# Altium PCB Project_Kondrashova_motor_driver.PcbDoc
Units mm, origin at the board's own origin, x right, y up, seen from the top; angles counter-clockwise.
Board outline 42 x 30 mm, 4 copper layers (Top Layer, Signal Layer 1, Signal Layer 2, Bottom Layer), stack 1.522 mm thick; 38 components, 37 nets, 117 pads, 157 vias.
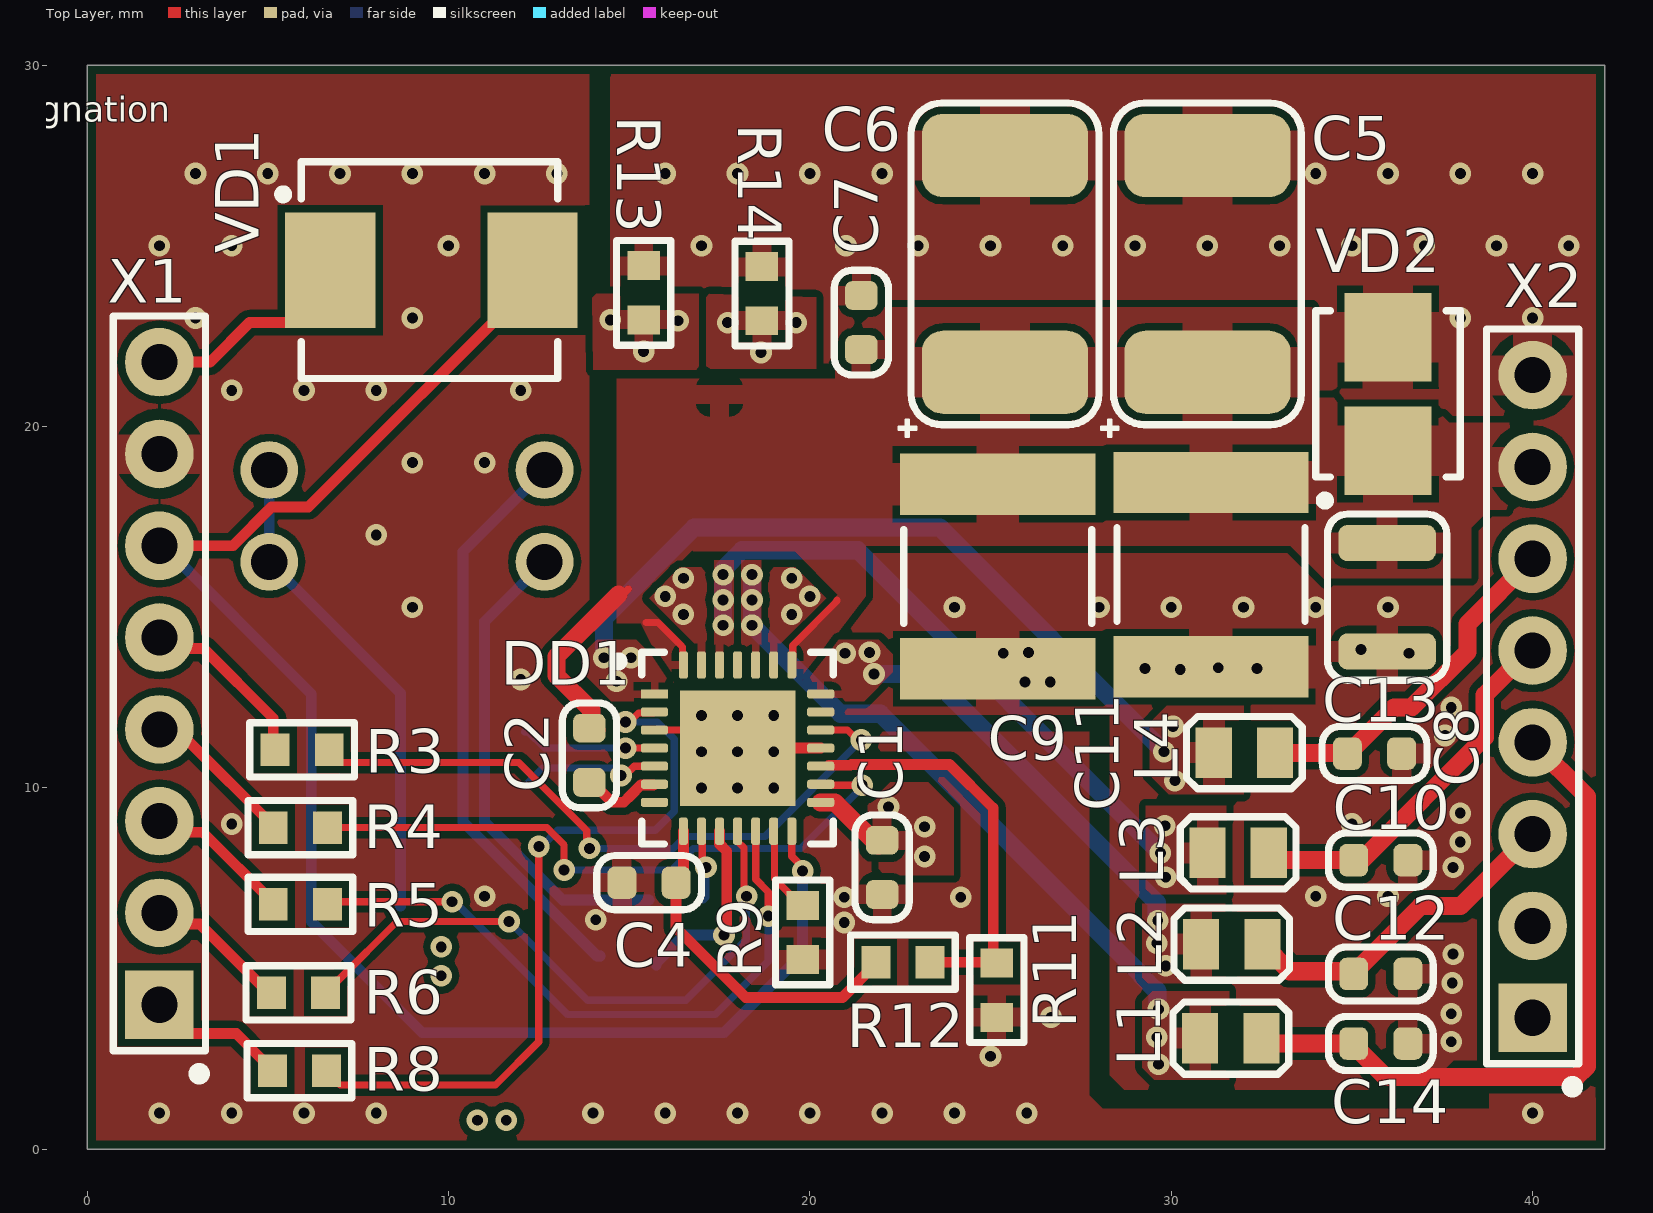
[diagram p0: Top Layer view]
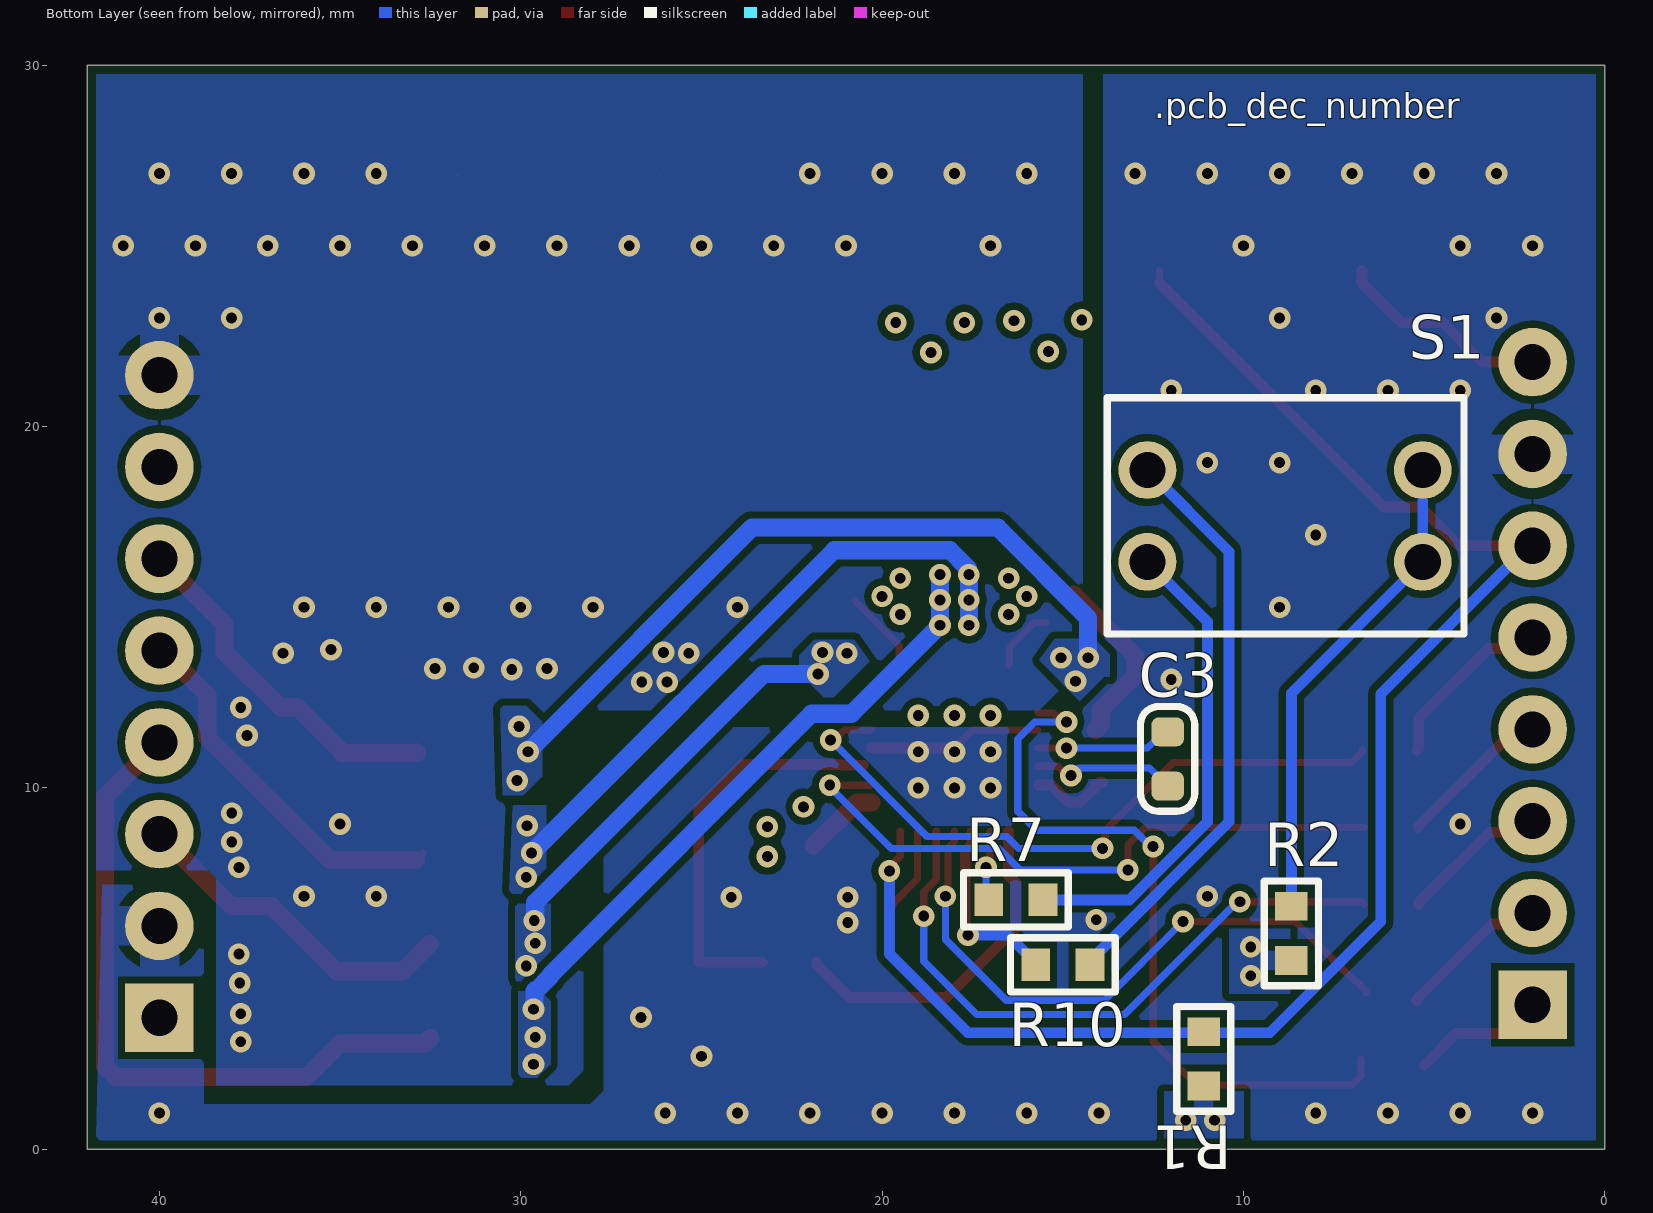
[diagram p1: Bottom Layer view, seen from below]
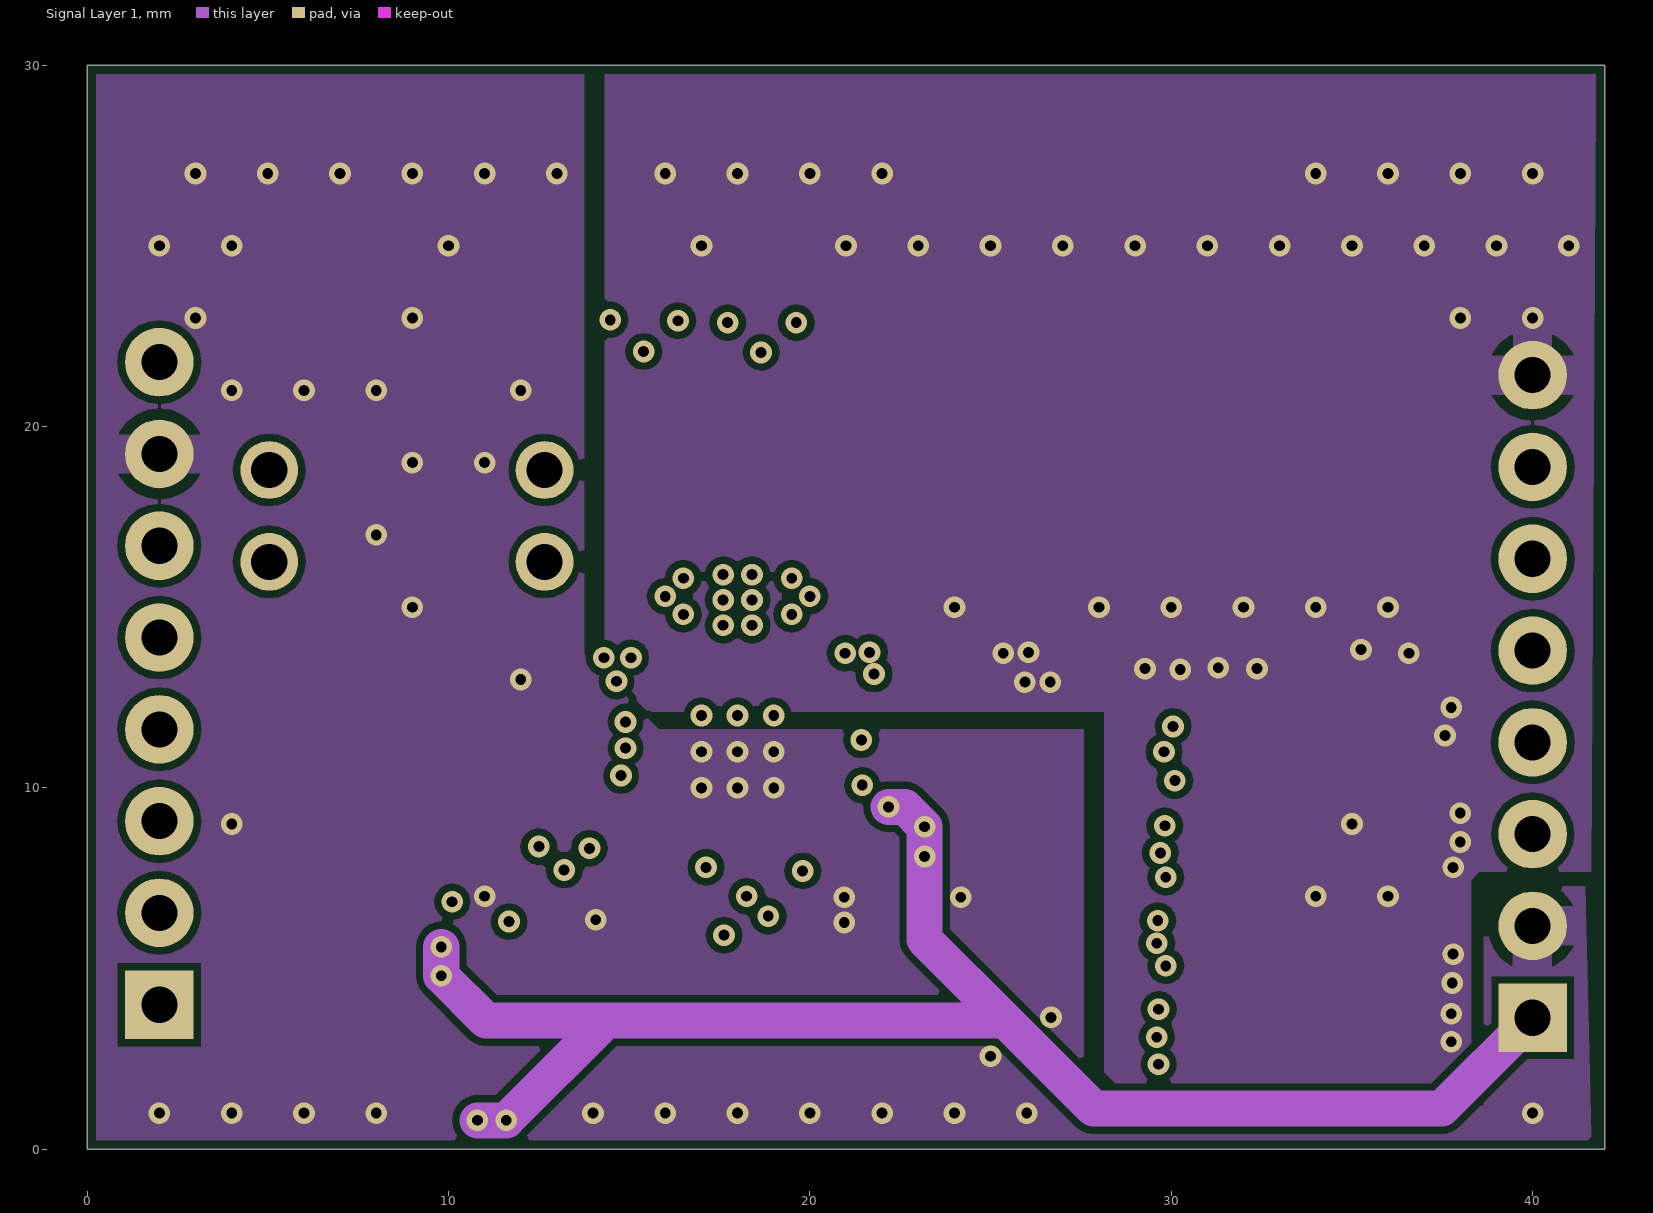
[diagram p2: Signal Layer 1]
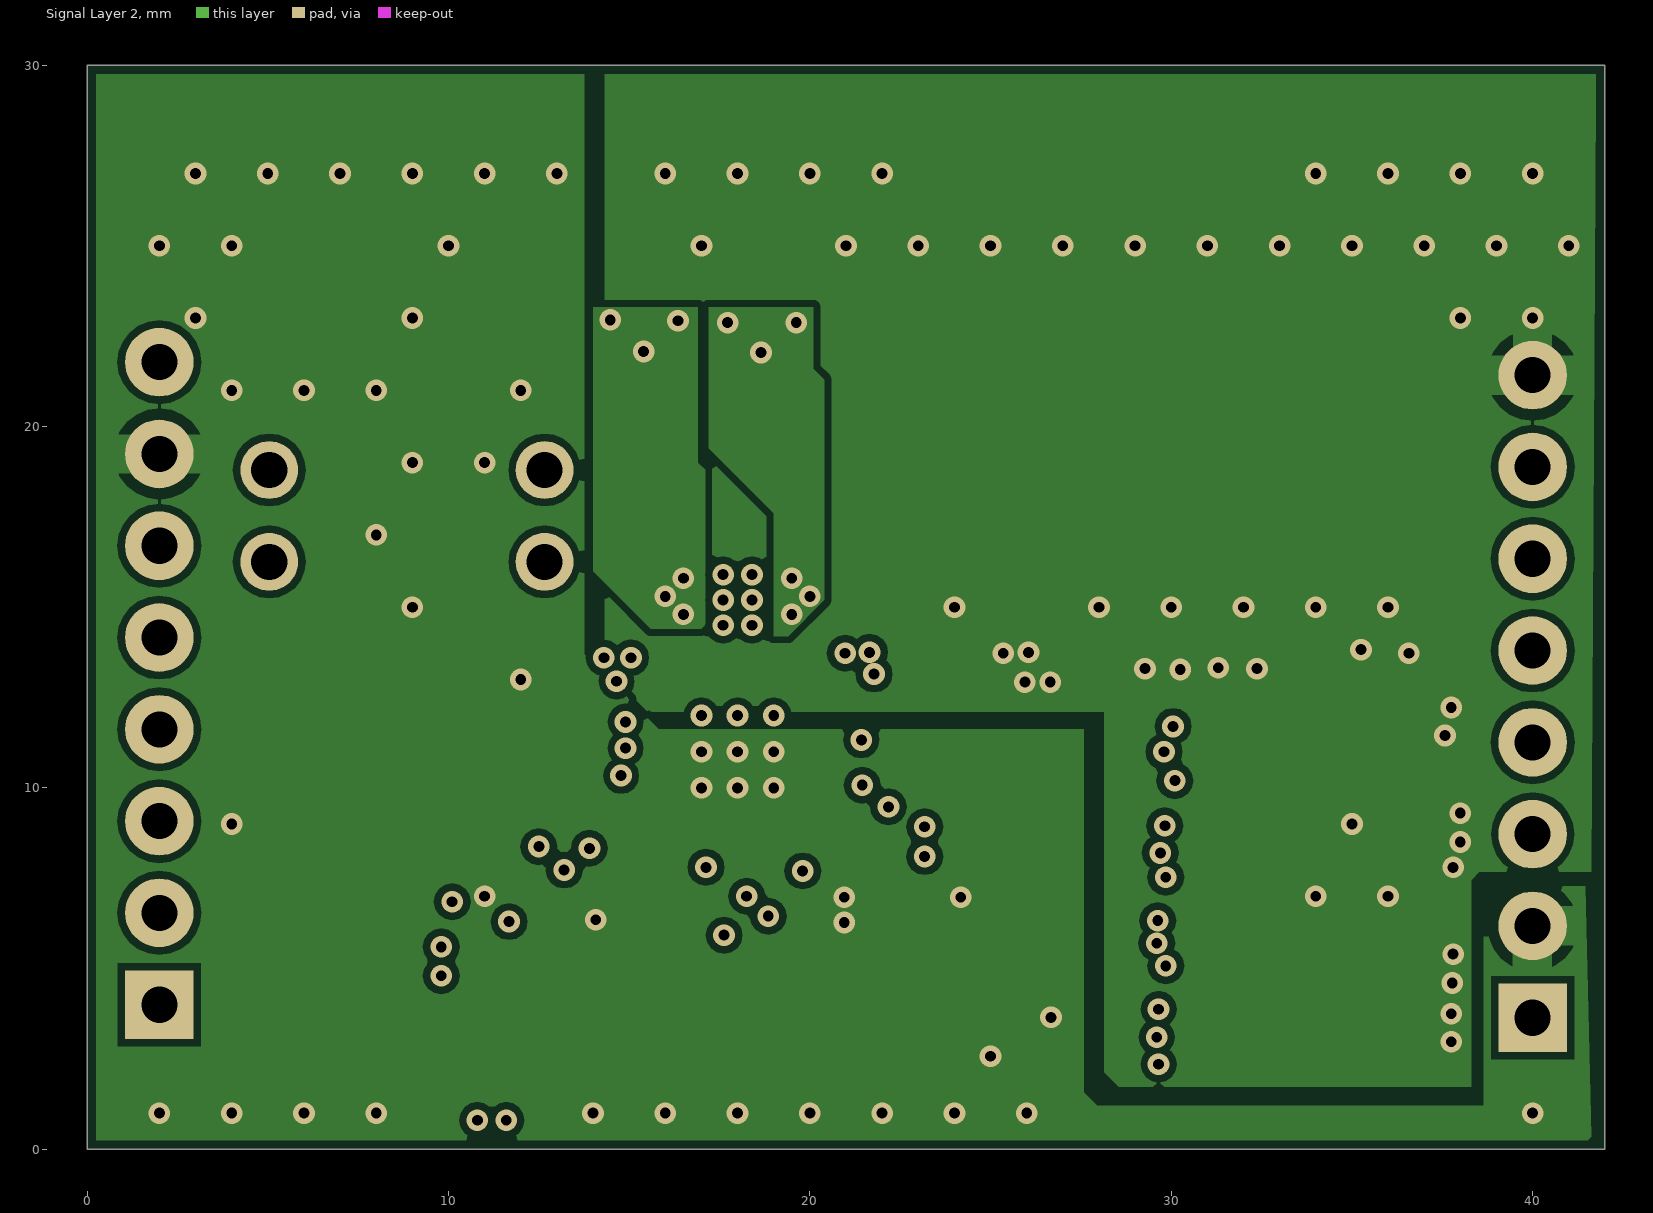
[diagram p3: Signal Layer 2]
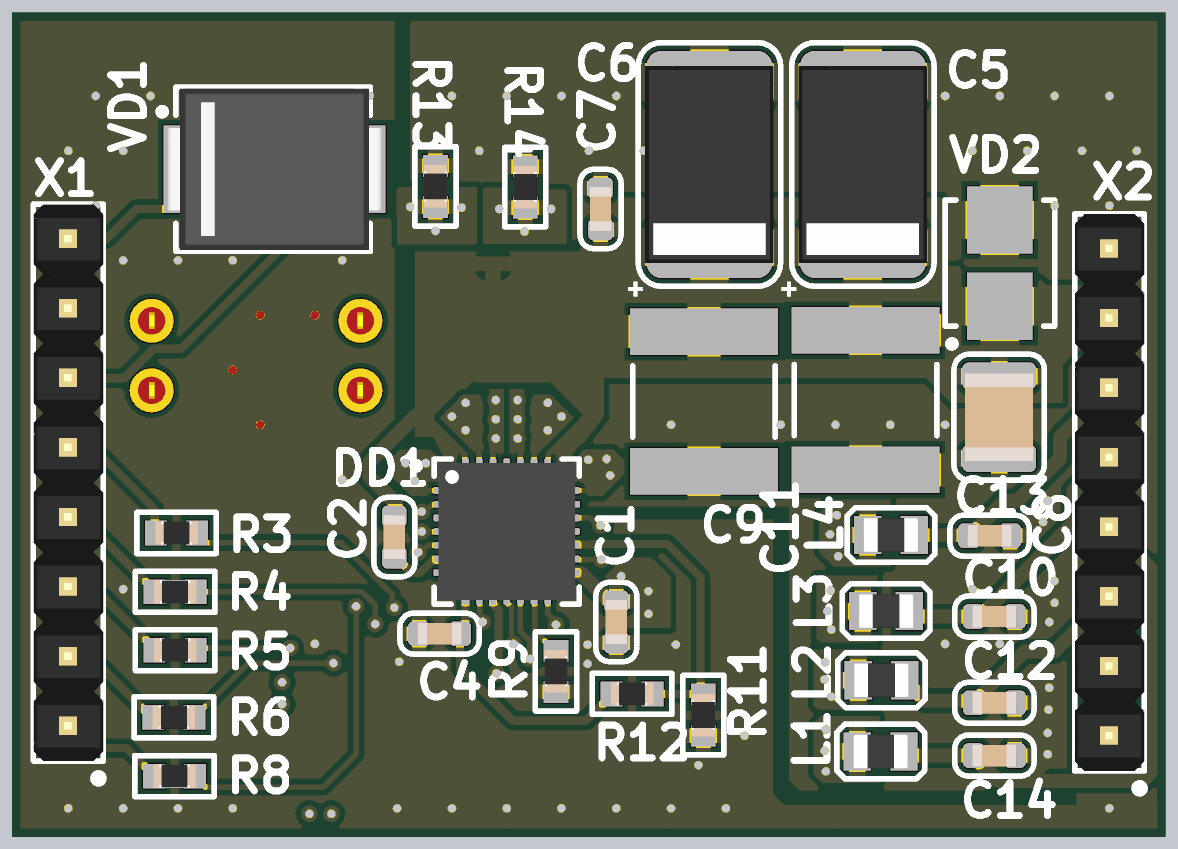
[diagram p4: 3D render of the assembled board from above, using the file's embedded part models]
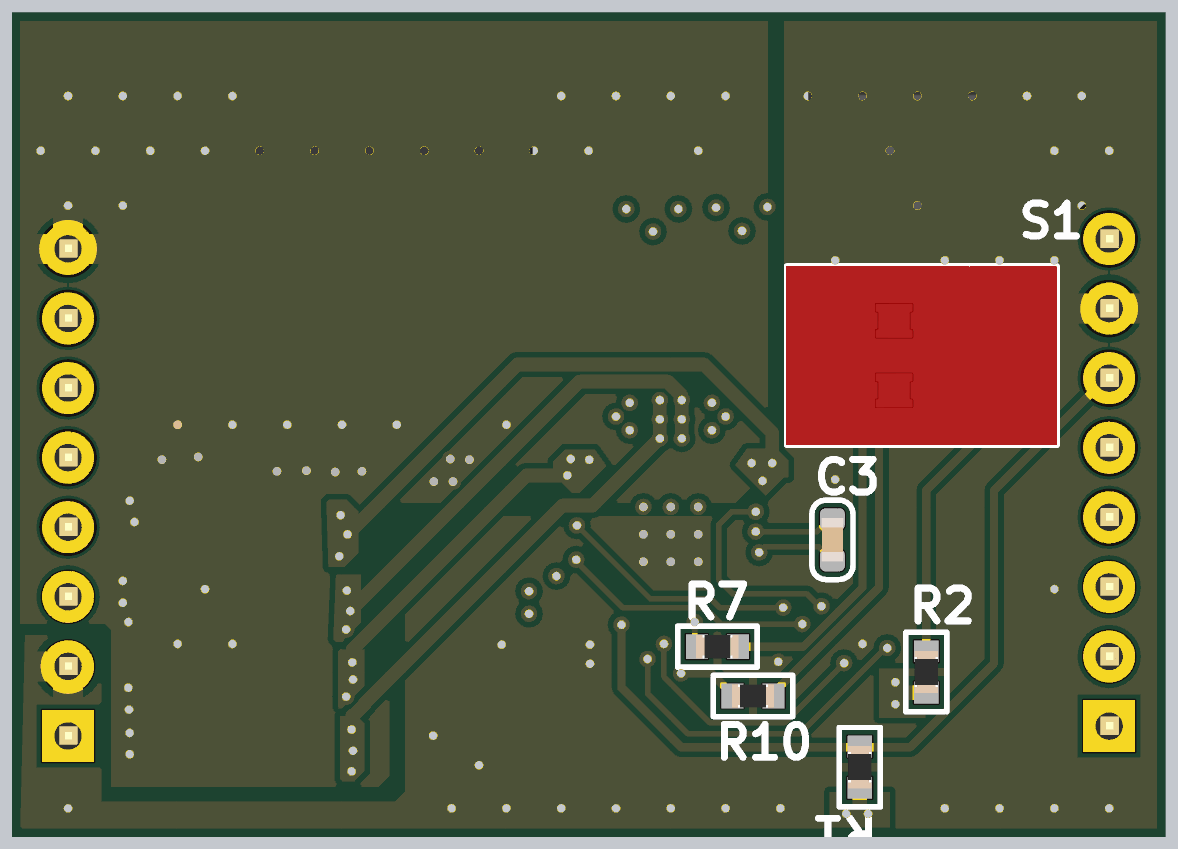
[diagram p5: 3D render of the assembled board from below, using the file's embedded part models]

## Layer stack, top to bottom
Top Solder: solder mask 0.0102, Solder Resist, Dk 3.5
Top Layer: signal copper 0.018
Prepreg 1: prepreg 0.125, FR4 HiTg170, Dk 5.07
Signal Layer 1: signal copper 0.018
Core 1: core 1.2, FR4, Dk 4.6
Signal Layer 2: signal copper 0.018
Prepreg 2: prepreg 0.125, FR4 HiTg170, Dk 5.07
Bottom Layer: signal copper 0.018
Bottom Solder: solder mask 0.0102, Solder Resist, Dk 3.5

## Board outline
0,0 0,30 42,30 42,0

## Design rules (kind name [scope] priority, off if disabled: settings)
AcuteAngle min_acute_angle [OnCopper] p1: minimum=3.50000000000000E+0001 checktracksonly=FALSE // Минимальный угол между примитивами топологии
BoardOutlineClearance board_outline_clearance_std [NOT (OnLayer('Bottom Overlay') OR OnLayer('Top Overlay'))] p1: gap=0.25 ignorepadtopadclearanceinfootprint=FALSE except(0: Arc-SplitContinuation Track-SplitContinuation SMDPad-SplitContinuation THPad-SplitContinuation Via-SplitContinuation Fill-SplitContinuation Poly-SplitContinuation Region-SplitContinuation Text-SplitContinuation) // Отступ элементов топологии от края фрезеруемой печатной платы
Clearance clearance_outer_18um_std [OnTopLayer OR OnBottomLayer] p1: gap=0.125 ignorepadtopadclearanceinfootprint=TRUE except(0.2: Arc-Fill Arc-Poly Track-Fill Track-Poly SMDPad-SMDPad SMDPad-Fill SMDPad-Poly THPad-Fill THPad-Poly Via-Fill Via-Poly Fill-Fill Fill-Poly Poly-Poly Poly-Region Poly-Text; 0.25: Arc-Hole Track-Hole SMDPad-Hole THPad-Hole Via-Hole Fill-Hole Poly-Hole Region-Hole Text-Hole) // Зазоры на внешних слоях
Clearance clearance_inner_18um_std [NOT (OnTopLayer Or OnBottomLayer)] p2: gap=0.125 ignorepadtopadclearanceinfootprint=FALSE except(0.2: Arc-Fill Arc-Poly Track-Fill Track-Poly SMDPad-SMDPad SMDPad-Fill SMDPad-Poly THPad-Fill THPad-Poly Via-Fill Via-Poly Fill-Fill Fill-Poly Poly-Poly Poly-Region Poly-Text; 0.25: Arc-Hole Track-Hole SMDPad-Hole THPad-Hole Via-Hole Fill-Hole Poly-Hole Region-Hole Text-Hole) // Зазоры на внутренних слоях
ComponentClearance [All] p1: gap=0 collisioncheckmode=3 verticalgap=0 showdistances=FALSE
DiffPairsRouting diff_pairs_routing [All] p1: maxlimit=0.254 minlimit=0.127 mostfreqgap=0.254 toplayer_maxgap=0.127 toplayer_prefgap=0.127 toplayer_minwidth=0.143 toplayer_maxwidth=0.143 toplayer_prefwidth=0.143 midlayer1_minwidth=0.381 midlayer1_maxwidth=0.381 midlayer1_prefwidth=0.381 midlayer2_minwidth=0.381 midlayer2_maxwidth=0.381 midlayer2_prefwidth=0.381 bottomlayer_maxgap=0.127 bottomlayer_prefgap=0.127 bottomlayer_minwidth=0.143 bottomlayer_maxwidth=0.143 bottomlayer_prefwidth=0.143 impedanceprofiledriven=TRUE impedanceprofileid={FD46899E-B5A2-4EF5-A302-5D2DB6A51F35} maxuncoupledlength=12.7 // Правила трассировки дифференциальных пар
HoleSize min_hole_size_std [IsPad] p1: absolutevalues=TRUE maxlimit=5.9 minlimit=0.6 maxpercent=80.000 minpercent=20.000 // Диаметр межслойного переходного отверстия
HoleSize min_hole_size_via_std [IsVia] p2: absolutevalues=TRUE maxlimit=5.9 minlimit=0.3 maxpercent=80.000 minpercent=20.000 // Минимальный диаметр монтажного отверстия
HoleToHoleClearance hole_to_hole_clearance_std [All] p1: gap=0.2 allowstackedmicrovias=FALSE // Минимальное расстояние между краями двух отверстий
MinimumAnnularRing min_via_ar_std [All] p1: minimumring=0.15 // Поясок площадки переходного отверстия (Annular ring VIA)
MinimumAnnularRing min_pad_ar_std [All] p2: minimumring=0.2 // Поясок монтажной контактной площадки (Annular ring PAD)
MinimumSolderMaskSliver min_solder_mask_bridge_std [All] p1: minsoldermaskwidth=0.15 // Мнимальная ширина масочного мостика
PlaneClearance plane_clearance_18um_std [All] p1: clearance=0.2 // Отступ полигона (для слоя plane) от элементов топологии
PlaneConnect [All] p1: planeconnectstyle=Relief reliefexpansion=0.5 reliefentries=4 reliefconductorwidth=0.2 reliefairgap=0.2
PolygonConnect poly_connect_to_pad<=0.3 [(AsMM(PadXSize_AllLayers)<=0.301) or (AsMM(PadYSize_AllLayers)<=0.301)] p1: thpad.connectstyle=Relief thpad.reliefconductorwidth=0.2 thpad.reliefentries=4 thpad.polygonreliefangle="90 Angle" thpad.airgapwidth=0.2 smdpad.connectstyle=Relief smdpad.reliefconductorwidth=0.2 smdpad.reliefentries=4 smdpad.polygonreliefangle="90 Angle" smdpad.airgapwidth=0.2 via.connectstyle=Direct via.reliefconductorwidth=0.254 via.reliefentries=4 via.polygonreliefangle="90 Angle" via.airgapwidth=0.254 // Правила подключения полигонов для падов от 0,3мм и меньше
PolygonConnect poly_connect_to_pad<=0.4 [(AsMM(PadXSize_AllLayers)<=0.401) or (AsMM(PadYSize_AllLayers)<=0.401)] p2: thpad.connectstyle=Relief thpad.reliefconductorwidth=0.26 thpad.reliefentries=4 thpad.polygonreliefangle="90 Angle" thpad.airgapwidth=0.2 smdpad.connectstyle=Relief smdpad.reliefconductorwidth=0.26 smdpad.reliefentries=4 smdpad.polygonreliefangle="90 Angle" smdpad.airgapwidth=0.2 via.connectstyle=Direct via.reliefconductorwidth=0.254 via.reliefentries=4 via.polygonreliefangle="90 Angle" via.airgapwidth=0.254 // Правила подключения полигонов для падов от 0,4 и меньше
PolygonConnect poly_connect_to_pad<=0.6 [(AsMM(PadXSize_AllLayers)<=0.601) or (AsMM(PadYSize_AllLayers)<=0.601)] p3: thpad.connectstyle=Relief thpad.reliefconductorwidth=0.33 thpad.reliefentries=4 thpad.polygonreliefangle="90 Angle" thpad.airgapwidth=0.2 smdpad.connectstyle=Relief smdpad.reliefconductorwidth=0.33 smdpad.reliefentries=4 smdpad.polygonreliefangle="90 Angle" smdpad.airgapwidth=0.2 via.connectstyle=Direct via.reliefconductorwidth=0.254 via.reliefentries=4 via.polygonreliefangle="90 Angle" via.airgapwidth=0.254 // Правила подключения полигонов для падов от 0,6мм и меньше
PolygonConnect poly_connect_to_pad<=0.7 [(AsMM(PadXSize_AllLayers)<=0.701) or (AsMM(PadYSize_AllLayers)<=0.701)] p4: thpad.connectstyle=Relief thpad.reliefconductorwidth=0.46 thpad.reliefentries=4 thpad.polygonreliefangle="90 Angle" thpad.airgapwidth=0.2 smdpad.connectstyle=Relief smdpad.reliefconductorwidth=0.46 smdpad.reliefentries=4 smdpad.polygonreliefangle="90 Angle" smdpad.airgapwidth=0.2 via.connectstyle=Direct via.reliefconductorwidth=0.254 via.reliefentries=4 via.polygonreliefangle="90 Angle" via.airgapwidth=0.254 // Правила подключения полигонов для падов от 0,7мм и меньше
PolygonConnect poly_connect_to_pad<=0.8 [(AsMM(PadXSize_AllLayers)<=0.8)or(AsMM(PadYSize_AllLayers)<=0.8)] p5: thpad.connectstyle=Relief thpad.reliefconductorwidth=0.53 thpad.reliefentries=4 thpad.polygonreliefangle="90 Angle" thpad.airgapwidth=0.3 smdpad.connectstyle=Relief smdpad.reliefconductorwidth=0.53 smdpad.reliefentries=4 smdpad.polygonreliefangle="90 Angle" smdpad.airgapwidth=0.2 via.connectstyle=Direct via.reliefconductorwidth=0.254 via.reliefentries=4 via.polygonreliefangle="90 Angle" via.airgapwidth=0.254 // Правила подключения полигонов для падов от 0,8мм и меньше
PolygonConnect poly_connect_to_pad<=1 [(AsMM(PadXSize_AllLayers)<=1.01)or(AsMM(PadYSize_AllLayers)<=1.01)] p6: thpad.connectstyle=Relief thpad.reliefconductorwidth=0.6 thpad.reliefentries=4 thpad.polygonreliefangle="90 Angle" thpad.airgapwidth=0.3 smdpad.connectstyle=Relief smdpad.reliefconductorwidth=0.6 smdpad.reliefentries=4 smdpad.polygonreliefangle="90 Angle" smdpad.airgapwidth=0.2 via.connectstyle=Direct via.reliefconductorwidth=0.254 via.reliefentries=4 via.polygonreliefangle="90 Angle" via.airgapwidth=0.254 // Правила подключения полигонов для падов от 1мм и меньше
PolygonConnect poly_connect_to_pad<=1.3 [(AsMM(PadXSize_AllLayers)<=1.31)or(AsMM(PadYSize_AllLayers)<=1.31)] p7: thpad.connectstyle=Relief thpad.reliefconductorwidth=0.66 thpad.reliefentries=4 thpad.polygonreliefangle="90 Angle" thpad.airgapwidth=0.3 smdpad.connectstyle=Relief smdpad.reliefconductorwidth=0.86 smdpad.reliefentries=4 smdpad.polygonreliefangle="90 Angle" smdpad.airgapwidth=0.2 via.connectstyle=Direct via.reliefconductorwidth=0.254 via.reliefentries=4 via.polygonreliefangle="90 Angle" via.airgapwidth=0.254 // Правила подключения полигонов для падов от 1,3мм и меньше
PolygonConnect poly_connect_to_pad<=1.6 [(AsMM(PadXSize_AllLayers)<=1.61)or(AsMM(PadYSize_AllLayers)<=1.61)] p8: thpad.connectstyle=Relief thpad.reliefconductorwidth=0.8 thpad.reliefentries=4 thpad.polygonreliefangle="90 Angle" thpad.airgapwidth=0.3 smdpad.connectstyle=Relief smdpad.reliefconductorwidth=1 smdpad.reliefentries=4 smdpad.polygonreliefangle="90 Angle" smdpad.airgapwidth=0.2 via.connectstyle=Direct via.reliefconductorwidth=0.254 via.reliefentries=4 via.polygonreliefangle="90 Angle" via.airgapwidth=0.254 // Правила подключения полигонов для падов от 1,6мм и меньше
PolygonConnect poly_connect_to_pad<=1.8 [(AsMM(PadXSize_AllLayers)<=1.8)or(AsMM(PadYSize_AllLayers)<=1.8)] p9: thpad.connectstyle=Relief thpad.reliefconductorwidth=1 thpad.reliefentries=4 thpad.polygonreliefangle="90 Angle" thpad.airgapwidth=0.3 smdpad.connectstyle=Relief smdpad.reliefconductorwidth=1.2 smdpad.reliefentries=4 smdpad.polygonreliefangle="90 Angle" smdpad.airgapwidth=0.2 via.connectstyle=Direct via.reliefconductorwidth=0.254 via.reliefentries=4 via.polygonreliefangle="90 Angle" via.airgapwidth=0.254 // Правила подключения полигонов для падов от 1,8мм и меньше
PolygonConnect poly_connect_to_pad<=2 [(AsMM(PadXSize_AllLayers)<=2.01)or(AsMM(PadYSize_AllLayers)<=2.01)] p10: thpad.connectstyle=Relief thpad.reliefconductorwidth=1.1 thpad.reliefentries=4 thpad.polygonreliefangle="90 Angle" thpad.airgapwidth=0.3 smdpad.connectstyle=Relief smdpad.reliefconductorwidth=1.4 smdpad.reliefentries=4 smdpad.polygonreliefangle="90 Angle" smdpad.airgapwidth=0.2 via.connectstyle=Direct via.reliefconductorwidth=0.254 via.reliefentries=4 via.polygonreliefangle="90 Angle" via.airgapwidth=0.254 // Правила подключения полигонов для падов от 2мм и меньше
PolygonConnect poly_connect_to_pad<=2.3 [(AsMM(PadXSize_AllLayers)<=2.31)or(AsMM(PadYSize_AllLayers)<=2.31)] p11: thpad.connectstyle=Relief thpad.reliefconductorwidth=1.2 thpad.reliefentries=4 thpad.polygonreliefangle="90 Angle" thpad.airgapwidth=0.3 smdpad.connectstyle=Relief smdpad.reliefconductorwidth=1.4 smdpad.reliefentries=4 smdpad.polygonreliefangle="90 Angle" smdpad.airgapwidth=0.2 via.connectstyle=Direct via.reliefconductorwidth=0.254 via.reliefentries=4 via.polygonreliefangle="90 Angle" via.airgapwidth=0.254 // Правила подключения полигонов для падов от 2,3мм и меньше
PolygonConnect poly_connect_to_pad<=2.5 [(AsMM(PadXSize_AllLayers)<=2.51)or(AsMM(PadYSize_AllLayers)<=2.51)] p12: thpad.connectstyle=Relief thpad.reliefconductorwidth=1.2 thpad.reliefentries=4 thpad.polygonreliefangle="90 Angle" thpad.airgapwidth=0.3 smdpad.connectstyle=Relief smdpad.reliefconductorwidth=1.4 smdpad.reliefentries=4 smdpad.polygonreliefangle="90 Angle" smdpad.airgapwidth=0.2 via.connectstyle=Direct via.reliefconductorwidth=0.254 via.reliefentries=4 via.polygonreliefangle="90 Angle" via.airgapwidth=0.254 // Правила подключения полигонов для падов от 2,5мм и меньше
PolygonConnect poly_connect_to_pad<=2.7 [(AsMM(PadXSize_AllLayers)<=2.71)or(AsMM(PadYSize_AllLayers)<=2.71)] p13: thpad.connectstyle=Relief thpad.reliefconductorwidth=1.4 thpad.reliefentries=4 thpad.polygonreliefangle="90 Angle" thpad.airgapwidth=0.3 smdpad.connectstyle=Relief smdpad.reliefconductorwidth=1.6 smdpad.reliefentries=4 smdpad.polygonreliefangle="90 Angle" smdpad.airgapwidth=0.2 via.connectstyle=Direct via.reliefconductorwidth=0.254 via.reliefentries=4 via.polygonreliefangle="90 Angle" via.airgapwidth=0.254 // Правила подключения полигонов для падов от 2,7мм и меньше
PolygonConnect poly_connect_to_pad<=3 [(AsMM(PadXSize_AllLayers)<=3.01)or(AsMM(PadYSize_AllLayers)<=3.01)] p14: thpad.connectstyle=Relief thpad.reliefconductorwidth=1.6 thpad.reliefentries=4 thpad.polygonreliefangle="90 Angle" thpad.airgapwidth=0.3 smdpad.connectstyle=Relief smdpad.reliefconductorwidth=1.8 smdpad.reliefentries=4 smdpad.polygonreliefangle="90 Angle" smdpad.airgapwidth=0.2 via.connectstyle=Direct via.reliefconductorwidth=0.254 via.reliefentries=4 via.polygonreliefangle="90 Angle" via.airgapwidth=0.254 // Правила подключения полигонов для падов от 3мм и меньше
PolygonConnect poly_connect_to_pad<=7 [(AsMM(PadXSize_AllLayers)<7.01)or(AsMM(PadYSize_AllLayers)<=7.01)] p15: thpad.connectstyle=Relief thpad.reliefconductorwidth=2 thpad.reliefentries=4 thpad.polygonreliefangle="90 Angle" thpad.airgapwidth=0.4 smdpad.connectstyle=Relief smdpad.reliefconductorwidth=2 smdpad.reliefentries=4 smdpad.polygonreliefangle="90 Angle" smdpad.airgapwidth=0.3 via.connectstyle=Direct via.reliefconductorwidth=0.254 via.reliefentries=4 via.polygonreliefangle="90 Angle" via.airgapwidth=0.254 // Правила подключения полигонов для падов от 7мм и меньше
PolygonConnect poly_connect_to_pad [All] p16: thpad.connectstyle=Relief thpad.reliefconductorwidth=0.25 thpad.reliefentries=4 thpad.polygonreliefangle="90 Angle" thpad.airgapwidth=0.2 smdpad.connectstyle=Relief smdpad.reliefconductorwidth=0.25 smdpad.reliefentries=4 smdpad.polygonreliefangle="90 Angle" smdpad.airgapwidth=0.2 via.connectstyle=Direct via.reliefconductorwidth=0.25 via.reliefentries=4 via.polygonreliefangle="90 Angle" via.airgapwidth=0.2 // Правила подключения полигонов общие
RoomDefinition Project_Kondrashova_motor_driver [InComponentClass('Project_Kondrashova_motor_driver')] p1: confinementstyle=ConfineIn formatcopy=TRUE lockcomponents=FALSE outline -58,-53 -7.2,-53 -7.2,-27.6 -58,-27.6
RoutingCorners [All] p1 off: cornerstyle=45-Degree minsetback=2.5 maxsetback=2.5
RoutingVias [All] p1: holewidth=0.3 width=0.6 viastyle="Through Hole" minholewidth=0.3 minwidth=0.6 maxholewidth=5.9 maxwidth=6.4
SilkToSilkClearance silk_to_silk_clearance_std [All] p1 off: silktosilkclearance=0.15 // Отступ текста шелкографии от других примитивов шелкографии
SilkToSolderMaskClearance silk_to_solder_mask_clearance_std [IsPad] p1 off: minsilkscreentomaskgap=0.15 clearancetoexposedcopper=FALSE // Минимальное расстояние между элементами шелкографии и вскрытой медью
SolderMaskExpansion solder_mask_expansion_std [All] p1: expansion=0.05 // Припуск паяльной масски
UnRoutedNet [All] p1: checkbadconnections=TRUE
Width width_18um_std [All] p1: maxlimit=10 minlimit=0.125 preferedwidth=0.15 checkconnectedcopper=TRUE // Ширина проводников (общая)
19 further rules are at their usual default settings.

## Components (designator, comment, footprint, x,y, rotation, side; value= is the part's Value field where it differs from the comment)
C1 "0,1 мк" C0603 22,7.8 r270 top
C2 "0,1 мк" C0603 13.9,10.9 r90 top
C3 "0,022 мк" C0603 12.1,10.8 r90 bottom
C4 "2,2 мк" C0603 15.55,7.375 r180 top
C5 "130 мк" C7343-43 31,24.5 r90 top
C6 "130 мк" C7343-43 25.4,24.5 r90 top
C7 "0,1 мк" C0603 21.425,22.875 r90 top
C8 "470" C0603 35.625,10.95 r0 top
C9 "10 мк" C2220 25.2,15.85 r270 top
C10 "470" C0603 35.8,8 r0 top
C11 "10 мк" C2220 31.1,15.9 r270 top
C12 "470" C0603 35.8,4.85 r0 top
C13 "1 мк" C1210 35.975,15.275 r270 top
C14 "470" C0603 35.8,2.925 r0 top
DD1 "TMC2208LA" QFN-28-P50-500X500X90-L55X25-T310X310 18,11.1 r0 top
L1 "BLM21PG600SH1" MI-2-0805 31.65,3.075 r0 top
L2 "BLM21PG600SH1" MI-2-0805 31.675,5.675 r0 top
L3 "BLM21PG600SH1" MI-2-0805 31.85,8.2 r0 top
L4 "BLM21PG600SH1" MI-2-0805 32.025,10.975 r0 top
R1 "10 к" R0603 11.1,2.5 r270 bottom
R2 "100" R0603 8.675,5.975 r270 bottom
R3 "100" R0603 5.95,11.05 r180 top
R4 "100" R0603 5.9,8.9 r180 top
R5 "100" R0603 5.9,6.775 r180 top
R6 "100" R0603 5.85,4.325 r180 top
R7 "47 к" R0603 16.3,6.9 r0 bottom
R8 "100" R0603 5.875,2.175 r180 top
R9 "10 к" R0603 19.8,6 r90 top
R10 "47 к" R0603 15,5.1 r0 bottom
R11 "3,3 к" R0603 25.175,4.4 r90 top
R12 "5,1 к" R0603 22.575,5.175 r180 top
R13 "0,12" R0603 15.4,23.7 r270 top
R14 "0,12" R0603 18.675,23.675 r270 top
S1 "DS1040-02RN" DS1040-02RN 8.85,17.525 r180 bottom
VD1 "SS36-E3/57T" DO-214AB-790X590X262 9.525,24.325 r0 top
VD2 "SMBJ36A" SMBJ36A 36,20.9 r90 top
X1 "DS1021-1x8SF11-B" DS1021-1X8SF11-B 2,12.89 r90 top
X2 "DS1021-1x8SF11-B" DS1021-1X8SF11-B 40,12.53 r90 top

## Footprints (in the part's own frame and the unit in brackets; to place one, negate y for a bottom-side part, rotate by r counter-clockwise, add the part's x,y. Pads: shape width x height; smd on the part's side, far side on the other; paste and mask are expansions set on the pad)
C0603 [mm] "Chip Capacitor, 2-Leads, Body 1,60x0,80mm, IPC Medium Density"
  rrect50% 0.8x0.9 smd: 1(-0.75,0) 2(0.75,0)
  silkscreen extent -1.45,-0.75 1.45,0.75, body extent -0.8,-0.4 0.8,0.4, height 0.8
C1210 [mm] "Chip Capacitor, 2-Leads, Body 3,20x2,50mm, IPC Medium Density"
  rrect50% 1x2.7 smd: 1(-1.5,0) 2(1.5,0)
  silkscreen extent -2.3,-1.65 2.3,1.65, body extent -1.6,-1.25 1.6,1.25, height 0.78
C2220 [mm]
  rect 1.7x5.4 smd: 1(-2.55,0) 2(2.55,0)
  silkscreen extent -1.3,-2.6 1.3,2.6, body extent -3.05,-2.7 3.05,2.7, height 1.5
C7343-43 [mm] "Chip Tantalum Capacitor, 2-Leads, Body 7,30x4,30mm, IPC Medium Density"
  rrect50% 2.3x4.6 smd: 1(-3,0) 2(3,0)
  Top Layer lines w0.05: 2.425,-0.75 2.45,-0.75
  silkscreen extent -4.8,-2.6 4.45,2.95, body extent -3.6,-2.35 3.59,2.35, height 4.11
DO-214AB-790X590X262 [mm] "Molded Diode, 2-Leads, Body 7,90x5,90mm, IPC Medium Density"
  rect 2.5x3.2 smd: 1(-2.8,0) 2(2.8,0)
  silkscreen extent -4.22,-3 3.5,3, body extent -3.95,-2.95 3.95,2.95, height 2.59
DS1021-1X8SF11-B [mm]
  rect 1.9x1.9 hole 1: 1(-8.89,0)
  round 1.9 hole 1: 2(-6.35,0) 3(-3.81,0)
  round 1.9 hole 1 mask+0.102: 4(-1.27,0) 5(1.27,0) 6(3.81,0) 7(6.35,0) 8(8.89,0)
  silkscreen extent -10.8,-1.28 10.17,1.28, body extent -10.17,-1.28 10.15,1.26, height 9.2
DS1040-02RN [mm]
  round 1.6 hole 1: 1(-3.81,-1.27) 2(3.81,-1.27) 3(-3.81,1.27) 4(3.81,1.27)
  silkscreen extent -4.92,-3.27 4.95,3.27, body extent -4.95,-3.27 4.95,3.27, height 6.8
MI-2-0805 [mm] "Chip Inductor, 2-Leads, Body 2,00x1,25mm, IPC Medium Density"
  rect 1x1.4 smd: 1(-0.85,0) 2(0.85,0)
  silkscreen extent -1.6,-1 1.6,1, body extent -1,-0.62 1,0.63, height 0.9
QFN-28-P50-500X500X90-L55X25-T310X310 [mm] "QFN, 28-Leads, Body 5,00x5,00mm, Pitch 0,50mm, Thermal Pad 3,10x3,10mm, IPC Medium Density"
  rect 3.2x3.2 smd: 0(0,0)
  rect 0.75x0.25 smd: 1(-2.3,1.5)
  rrect50% 0.75x0.25 smd: 2(-2.3,1) 3(-2.3,0.5) 4(-2.3,0) 5(-2.3,-0.5) 6(-2.3,-1) 7(-2.3,-1.5) 15(2.3,-1.5) 16(2.3,-1) 17(2.3,-0.5) 18(2.3,0) 19(2.3,0.5) 20(2.3,1) 21(2.3,1.5)
  rrect50% 0.25x0.75 smd: 8(-1.5,-2.3) 9(-1,-2.3) 10(-0.5,-2.3) 11(0,-2.3) 12(0.5,-2.3) 13(1,-2.3) 14(1.5,-2.3) 22(1.5,2.3) 23(1,2.3) 24(0.5,2.3) 25(0,2.3) 26(-0.5,2.3) 27(-1,2.3) 28(-1.5,2.3)
  silkscreen extent -3.42,-2.65 2.65,2.65, body extent -2.5,-2.5 2.5,2.5, height 0.9
R0603 [mm] "Chip Resistor, 2-Leads, Body 1,60x0,80mm, IPC Medium Density"
  rect 0.8x0.9 smd: 1(-0.75,0) 2(0.75,0)
  silkscreen extent -1.45,-0.75 1.45,0.75, body extent -0.77,-0.43 0.78,0.43, height 0.43
SMBJ36A [mm] "Molded Diode, 2-Leads, Body 4,31x3,62mm, IPC Medium Density"
  rect 2.45x2.4 smd: 1(-1.575,0) 2(1.575,0)
  silkscreen extent -3.07,-2 2.3,2, body extent -2.29,-1.97 2.28,1.97, height 2.44

## Part data
C1 C2 C7: library part c0063, "=Описание", HelpURL=https://www.yageo.com/upload/media/product/productsearch/datasheet/mlcc/UPY-GPHC_X7R_6.3V-to-50V_20.pdf, ID=c0063, Корпус=0603, Наименование=CC0603JRX7R9BB104, Напряжение="50 В", Номинал="0,1 мк", Номинальное напряжение="50 В", Описание="Конденсатор керамический чип 0603 100 нФ 50 В ±5 %", Отклонение="±5 %", Производитель="YAGEO Corp.", Рабочие температуры="от –55 °С до +125 °С", Температурный коэффициент емкости=X7R, Фамилия=Ларионов
C3: library part c0047, "=Описание", HelpURL=https://www.yageo.com/upload/media/product/productsearch/datasheet/mlcc/UPY-GPHC_X7R_6.3V-to-50V_20.pdf, ID=c0047, Корпус=0603, Наименование=CC0603KRX7R9BB223, Напряжение="50 В", Номинал="0,022 мк", Номинальное напряжение="50 В", Описание="Конденсатор керамический чип 0603 22 нФ 50 В ±10 %", Отклонение="±10 %", Производитель="YAGEO Corp.", Рабочие температуры="от –55 °С до +125 °С", Температурный коэффициент емкости=X7R, Фамилия=Паньков
C4: library part c0099, "=Описание", HelpURL=https://www.yageo.com/upload/media/product/productsearch/datasheet/mlcc/UPY-GPHC_X5R_4V-to-50V_26.pdf, ID=c0099, Корпус=0603, Наименование=CC0603KRX5R6BB225, Напряжение="10 В", Номинал="2,2 мк", Номинальное напряжение="10 В", Описание="Конденсатор керамический чип 0603 2,2 мкФ 10 В ±10 %", Отклонение="±10 %", Производитель="YAGEO Corp.", Рабочие температуры="от –55 °С до +85 °С", Температурный коэффициент емкости=X5R, Фамилия=Паньков
C5 C6: library part c0150, "=Описание", HelpURL=https://www.vishay.com/capacitors/list/product-40002/, ID=c0150, Корпус=7343-43, Наименование=293D157X9016E2TE3, Напряжение="50 В", Номинал="130 мк", Номинальное напряжение="50 В", Описание="Конденсатор танталовый чип 7343-43 150 мкФ 16 В ±10 %", Отклонение="±10 %", Производитель="Vishay Intertechnology, Inc.", Рабочие температуры="от –55 °С до +125 °С", Среднеквадратичный размах пульсации тока="0,57 А", Фамилия=Паньков, Эквивалентное последовательное сопротивление="0,5 Ом"
C8 C10 C12 C14: library part c0154, "=Описание", HelpURL=https://www.yageo.com/upload/media/product/productsearch/datasheet/mlcc/UPY-GPHC_X7R_6.3V-to-50V_20.pdf, ID=c0154, Корпус=0603, Наименование=CC0603JPX7R9BB101, Напряжение="50 В", Номинал=470, Номинальное напряжение="50 В", Описание="Конденсатор керамический чип 0603 470мкФ 50 В ±5 %", Отклонение="±5 %", Производитель="YAGEO Corp.", Рабочие температуры="от –55 °С до +125 °С", Температурный коэффициент емкости=X7R
C9 C11: library part c0152, "=Описание", ID=c0152, Корпус=2220, Напряжение="50 В", Номинал="10 мк", Номинальное напряжение="50 В", Описание="Конденсатор керамический чип 2220 10 мк 50 В ±2 %", Отклонение="±2 %", Производитель="KEMET Corporation", Рабочие температуры="от –55 °С до +125 °С", Температурный коэффициент емкости=X7R
C13: library part c0153, "=Описание", HelpURL=https://www.yageo.com/upload/media/product/productsearch/datasheet/mlcc/UPY-NP0X7R_MV_100-to-630V_22.pdf, ID=c0153, Корпус=1210, Напряжение="50 В", Номинал="1 мк", Номинальное напряжение="50 В", Описание="Конденсатор керамический чип 1210 1 мк 50 В ±10 %", Отклонение="±5 %", Производитель="YAGEO Corp.", Рабочие температуры="от –55 °С до +125 °С", Температурный коэффициент емкости=C0G
DD1: library part dd0002, "=Описание", ID=dd0002
L1 L2 L3 L4: library part l0004, "=Описание", HelpURL=https://www.laird.com/products/inductive-components-emc-components-and-ferrite-cores/ferrite-chip-beads/0805-series/mi0805k400r-10, ID=l0004, Корпус=0805, Наименование=BLM21PG600SH1, Описание="Ферритовая бусина 60 Ом ±25 %", Отклонение, 100 МГц="±25 %", Производитель="Murata Manufacturing Co., Ltd.", Рабочие температуры="от –55 °С до +125 °С", Сопротивление, 100 МГц="60 Ом", Сопротивление при постоянном токе="0,1 Ом", Фамилия=Самарин
R1 R9: library part r0105, "=Описание", HelpURL=https://www.yageo.com/upload/media/product/productsearch/datasheet/rchip/PYu-RC_Group_51_RoHS_L_11.pdf, ID=r0105, Корпус=0603, Наименование=RC0603FR-0710KL, Номинал="10 к", Номинальное напряжение="75 В", Номинальный ток="1 А", Описание="Резистор чип 0603 10 кОм ±1 % 0,1 Вт", Отклонение="±1 %", Примечание="Ряд E24", Производитель="YAGEO Corp.", Рабочие температуры="от –55 °С до +155 °С", Фамилия=Самарин
R2 R3 R4 R5 R6 R8: library part r0052, "=Описание", HelpURL=https://www.yageo.com/upload/media/product/productsearch/datasheet/rchip/PYu-RC_Group_51_RoHS_L_11.pdf, ID=r0052, Корпус=0603, Наименование=RC0603FR?-07100RL, Номинал=100, Номинальное напряжение="75 В", Номинальный ток="1 А", Описание="Резистор чип 0603 100 Ом ±1 % 0,1 Вт", Отклонение="±1 %", Примечание="Ряд E24", Производитель="YAGEO Corp.", Рабочие температуры="от –55 °С до +155 °С", Фамилия=Самарин
R7 R10: library part r0129, "=Описание", HelpURL=https://www.yageo.com/upload/media/product/productsearch/datasheet/rchip/PYu-RC_Group_51_RoHS_L_11.pdf, ID=r0129, Корпус=0603, Наименование=RC0603FR-0747KL, Номинал="47 к", Номинальное напряжение="75 В", Номинальный ток="1 А", Описание="Резистор чип 0603 47 кОм ±1 % 0,1 Вт", Отклонение="±1 %", Примечание="Ряд E24", Производитель="YAGEO Corp.", Рабочие температуры="от –55 °С до +155 °С", Фамилия=Паньков
R11: library part r0089, "=Описание", HelpURL=https://www.yageo.com/upload/media/product/productsearch/datasheet/rchip/PYu-RC_Group_51_RoHS_L_11.pdf, ID=r0089, Корпус=0603, Наименование=RC0603FR-073K3L, Номинал="3,3 к", Номинальное напряжение="75 В", Номинальный ток="1 А", Описание="Резистор чип 0603 3,3 кОм ±1 % 0,1 Вт", Отклонение="±1 %", Примечание="Ряд E24", Производитель="YAGEO Corp.", Рабочие температуры="от –55 °С до +155 °С", Фамилия=Паньков
R12: library part r0096, "=Описание", HelpURL=https://www.yageo.com/upload/media/product/productsearch/datasheet/rchip/PYu-RC_Group_51_RoHS_L_11.pdf, ID=r0096, Корпус=0603, Наименование=RC0603FR-075K1L, Номинал="5,1 к", Номинальное напряжение="75 В", Номинальный ток="1 А", Описание="Резистор чип 0603 5,1 кОм ±1 % 0,1 Вт", Отклонение="±1 %", Примечание="Ряд E24", Производитель="YAGEO Corp.", Рабочие температуры="от –55 °С до +155 °С", Фамилия=Жернаков
R13 R14: library part r0183, "=Описание", HelpURL=https://www.vishay.com/resistors-fixed/list/product-20019/tab/documents/, ID=r0183, Корпус=0603, Наименование=RCWE0603R120FKEA, Номинал=0,12, Номинальное напряжение="не указано", Номинальный ток="не указано", Описание="Резистор чип 0603 120 мОм ±1 % 0,2 Вт", Отклонение="±1 %", Примечание="Ряд E24", Производитель="Vishay Intertechnology, Inc.", Рабочие температуры="от –55 °С до +155 °С", Фамилия=Паньков
S1: library part s0009, "=Описание", HelpURL=http://en.connfly.group/product/xVkr=EusQssAN0gN=Aos=mU+UrVkR9kqEAN0gN0IWS+QNB+A, ID=s0009, Количество контактов=4, Корпус="6,54 x 9,90 x 5,50", Наименование=DS1040-02RN, Описание="2-х позиционный движковый переключатель", Производитель="Connfly Electronic Co., Ltd.", Промывка=Запрещена, Рабочие температуры="от –40 °С до +105 °С", Сопротивление контакта="100 мОм", Ток нагрузки="100 мА @ 24 В", Фамилия=Паньков
VD1: library part vd0005, "=Описание", HelpURL=https://www.vishay.com/product?docid=88751, ID=vd0005, Корпус=DO-214AB, Максимальное обратное напряжение="60 В", Максимальное прямое напряжение="0,75 В", Максимальный прямой ток="3 А", Наименование=SS36-E3/57T, Описание="Диод Шоттки 60 В 3 А", Производитель="Vishay Intertechnology, Inc.", Рабочие температуры="от –55 °С до +150 °С", Фамилия=Жернаков
VD2: library part vd0031, "=Описание", ID=vd0031, Корпус=SMBJ036A, Наименование=SMBJ36A, Номинальное напряжение стабилизации="36 В", Номинальный ток стабилизации="1 мА", Описание="Стабилитрон 36 В", Производитель="Vishay Intertechnology, Inc.", Рабочие температуры="от –55 °С до +150 °С", Разброс напряжения стабилизации="40,0…44,2 В", Фамилия=Жернаков
X1 X2: library part x0024, "=Описание", HelpURL=http://en.connfly.group/product/xVkr=EusQssAN0gN=Aos=mU+UrVkR9kqEAN0gN9g+WqANB+A, ID=x0024, Наименование=DS1021-1x8SF11-B, Описание="PLS 8 pin 2,54 мм вилка прямой", Производитель="Connfly Electronic Co., Ltd.", Фамилия=Паньков
  X1: Contact_1=nEN, Contact_2=DIAG, Contact_3=INDEX, Contact_4=STEP, Contact_5=DIR, Contact_6=RX, Contact_7=GND, Contact_8=TX
  X2: Contact_1=+5В, Contact_2=GND, Contact_3=OA2, Contact_4=OA1, Contact_5=OB1, Contact_6=OB2, Contact_7=+24В, Contact_8=PGND

## Via types
v1: diameter 0.6/0.6/0.6/0.6 (per signal layer), hole 0.3, Top Layer to Bottom Layer, tented both sides, 157 vias

## Nets (pads, with @x,y where several pads share a name; then routed paths per layer and width w, separated by ;. In a path a pad name is that pad's centre, name@x,y a point inside that pad or via, vN(x,y) a via of type N, cw(c..) or ccw(c..) an arc to the next point about the centre after c; other vN are vias at no path point)
+5В: C1.1 DD1.15 R1.2 R2.2 X2.1 | length 47.9
  Top Layer w0.5: DD1.15 20.7,9.6 C1.1@21.9,8.4
  Signal Layer 1 w1: v1(9.8,5.6) v1(9.8,4.8) 11.038,3.562 14.362,3.562 ; v1(10.8,0.8) v1(11.6,0.8) 14.362,3.562 ; v1(22.175,9.475) 22.625,9.475 v1(23.175,8.925) v1(23.175,8.1) 23.175,5.8 25.412,3.562 ; X2.1 37.485,1.125 27.85,1.125 25.412,3.562 ; 14.362,3.562 25.412,3.562
+24В: C2.2 C5.1 C6.1 C7.1 C9.1 C11.1 C13.1 DD1.22 DD1.28 VD2.1 X2.7 | length 9.4
  Top Layer w0.2: 14.7,15.35 14.825,15.35 14.975,15.5 ; 15.475,14.575 15.8,14.575 16.475,13.9 16.475,13.425 DD1.28 ; DD1.22 19.525,13.425 19.525,13.943 20.75,15.168 20.75,15.2
  Top Layer w0.5: C2.2@14.1,11.6 13.95,11.75 13.95,12.15 12.983,13.117 12.983,13.633 14.7,15.35
GND: C1.2 C4.2 DD1.0 DD1.3 DD1.18 R9.1 R11.1 X1.7 X2.2 | length 4.8
  Top Layer w0.2: DD1.3 17.5,11.6 DD1.0@17.913,11.187
  Top Layer w0.3: DD1.0@17.913,11.187 DD1.0 DD1.18
  other v1: 2,1 4,1 6,1 8,1 14,1 16,1 18,1 20,1 22,1 24,1 26,1 40,1 25,2.575 26.675,3.65 20.95,6.275 14.075,6.35 20.95,6.975 24.175,6.975 11,7 4,9 17,10 18,10 19,10 17,11 18,11 19,11 17,12 18,12 19,12 12,13 9,15 8,17 9,19 11,19 4,21 6,21 8,21 12,21 3,23 9,23 2,25 4,25 10,25 3,27 5,27 7,27 9,27 11,27 13,27
NetC2_1: C2.1 DD1.6 | length 2.4
  Top Layer w0.3: C2.1 13.977,10.15 14.527,9.6 14.848,9.6 15.05,9.802 15.323,10.075 DD1.6@15.675,10.075 ; C2.1@14.1,10.1 14.1,10.027 C2.1@14.196,9.931
NetC3_1: C3.1 DD1.5 | length 4
  Top Layer w0.2: v1(14.775,10.34) 14.883,10.34 15.142,10.6 DD1.5
  Bottom Layer w0.2: C3.1 12.6,10.55 14.565,10.55 v1(14.775,10.34)
NetC3_2: C3.2 DD1.4 | length 3.8
  Top Layer w0.2: v1(14.9,11.1) DD1.4
  Bottom Layer w0.2: C3.2 12.204,11.55 12.654,11.1 v1(14.9,11.1)
NetC4_1: C4.1 DD1.8 R12.2 | length 9.5
  Top Layer w0.3: DD1.8 16.5,7.575 C4.1 16.3,6.125 18.225,4.2 20.9,4.2 21.825,5.125 R12.2
NetDD1_1: DD1.1 L4.1 | length 20.2
  Bottom Layer w0.5: v1(14.3,13.6) 14.3,14.7 16.8,17.2 23.6,17.2 v1(29.8,11)
  other v1: 30.1,10.2 30.05,11.7 14.65,12.95 15.05,13.6
NetDD1_2: DD1.2 R8.1 | length 20.8
  Top Layer w0.2: R8.1@6.75,2.5 6.75,2.025 7,1.775 11.3,1.775 12.5,2.975 v1(12.5,8.375) ; v1(14.9,11.825) 15.008,11.825 15.258,12.075 15.675,12.075 DD1.2
  Bottom Layer w0.2: v1@12.55,8.35 13.025,8.825 15.725,8.825 16.25,9.35 16.25,11.35 15.775,11.825 v1(14.9,11.825)
NetDD1_9: DD1.9 R7.2 | length 2
  Top Layer w0.2: DD1.9 17.025,8.775 17.025,7.901 v1(17.126,7.8)
  Bottom Layer w0.2: R7.2 17.126,6.976 v1(17.126,7.8)
NetDD1_10: DD1.10 R10.2 | length 5.2
  Top Layer w0.3: DD1.10 17.5,8.448 17.701,8.247 17.701,6.001 v1(17.625,5.925)
  Bottom Layer w0.3: R10.2 15.75,5.15 16.525,5.925 v1(17.625,5.925)
NetDD1_11: DD1.11 R6.1 | length 17.2
  Top Layer w0.2: R6.1 6.6,4.375 6.9,4.675 6.95,4.675 8.575,6.3 v1(11.675,6.3) ; DD1.11 18,8.518 18.175,8.343 18.175,7.075 v1(18.25,7)
  Bottom Layer w0.2: v1(11.675,6.3) 13.85,4.125 16.567,4.125 18.25,5.808 v1(18.25,7)
NetDD1_12: DD1.12 R5.1 | length 17.8
  Top Layer w0.2: R5.1 6.725,6.85 v1(10.1,6.85) ; DD1.12 18.5,7.47 18.85,7.12 v1(18.85,6.45)
  Bottom Layer w0.2: v1@10.175,6.85 13.3,3.725 17.375,3.725 18.85,5.2 v1(18.85,6.45)
NetDD1_13: DD1.13 R9.2 | length 2.4
  Top Layer w0.2: DD1.13@19.025,8.775 19.025,7.475 R9.2@19.75,6.75
  Top Layer w0.3: R9.2@19.75,6.75 R9.2
NetDD1_14: DD1.14 R1.1 VD1.2 X1.6 | length 45.2
  Top Layer w0.2: VD1.2@12.325,23.975 VD1.2 ; DD1.14 19.5,8.108 19.8,7.808 v1(19.8,7.7)
  Top Layer w0.3: X1.6 4.035,16.7 5.105,17.77 6.12,17.77 VD1.2@12.325,23.975
  Bottom Layer w0.3: X1.6@2,16.8 6.2,12.6 6.2,6.3 9.275,3.225 11.025,3.225 17.625,3.225 19.8,5.4 v1(19.8,7.7)
NetDD1_16: DD1.16 R4.1 | length 17.9
  Top Layer w0.2: R4.1 12.717,8.9 13.2,8.417 v1(13.2,7.725) ; DD1.16 20.325,10.075 v1(21.451,10.075)
  Bottom Layer w0.2: v1(13.2,7.725) 16.176,7.725 16.776,8.325 19.75,8.325 21.451,10.026 v1(21.451,10.075)
NetDD1_17: DD1.17 R11.2 R12.1 | length 11.1
  Top Layer w0.3: DD1.17@20.525,10.625 21.125,10.625 21.15,10.65 23.863,10.65 25.075,9.438 25.075,5.175 R12.1
NetDD1_19: DD1.19 R3.1 | length 18.6
  Top Layer w0.2: R3.1 6.7,11 7,10.7 11.942,10.7 13.823,8.819 13.823,8.402 v1(13.9,8.325) ; DD1.19 21.042,11.6 21.317,11.325 v1(21.425,11.325)
  Bottom Layer w0.2: v1(13.9,8.325) 16.217,8.325 16.542,8.65 18.75,8.65 v1(21.425,11.325)
NetDD1_21: DD1.21 L2.1 | length 11
  Bottom Layer w0.5: v1(20.975,13.725) v1@20.988,13.738 ; v1@21.638,13.738 v1(21.65,13.75) v1@21.65,13.723 ; v1@21.756,13.169 v1(21.775,13.15) 23.275,13.15 29.6,6.825 v1@29.6,6.35
  other v1: 29.85,5.075 29.6,5.7 29.625,6.325
NetDD1_23: DD1.23 R14.2
  other v1: 19.5,14.8 20,15.3 19.5,15.8 18.65,22.05 17.725,22.875 19.625,22.875
NetDD1_24: DD1.24 L1.1 | length 17.3
  Bottom Layer w0.5: v1(18.4,15.9) v1(18.4,15.2) v1(18.4,14.5) 20.85,12.05 21.95,12.05 29.175,4.825 29.175,4.795 29.57,4.4 29.6,4.4 29.625,4.375 v1@29.625,3.925
  other v1: 29.65,2.35 29.6,3.1 29.65,3.875
NetDD1_26: DD1.26 L3.1 | length 17.3
  Bottom Layer w0.5: v1(17.6,14.5) v1(17.6,15.2) v1(17.6,15.9) 17.619,15.919 17.619,16.074 18.12,16.575 21.325,16.575 v1(29.7,8.2)
  other v1: 29.85,7.525 29.825,8.95
NetDD1_27: DD1.27 R13.2
  other v1: 16.5,14.8 16,15.3 16.5,15.8 15.4,22.075 16.35,22.925 14.475,22.95
NetR2_1: R2.1 S1.2 S1.4 | length 13.6
  Bottom Layer w0.3: S1.4 S1.2 8.675,12.62 R2.1
NetR3_2: R3.2 X1.5 | length 5
  Top Layer w0.3: X1.5 2.306,13.854 3.221,13.854 5.15,11.925 5.15,11.1 R3.2
NetR4_2: R4.2 X1.4 | length 4.3
  Top Layer w0.3: X1.4 2.306,11.314 2.786,11.314 5.15,8.95 R4.2
NetR5_2: R5.2 X1.3 | length 4.1
  Top Layer w0.3: X1.3 2.306,8.774 3.201,8.774 5.15,6.825 R5.2
NetR6_2: R6.2 X1.2 | length 4.2
  Top Layer w0.3: X1.2 2.306,6.234 3.116,6.234 5.2,4.15 R6.2@5.2,4.1
NetR7_1: R7.1 S1.1 | length 13.3
  Bottom Layer w0.3: S1.1 11,14.595 11,9.062 13.162,6.9 R7.1
NetR8_2: R8.2 X1.1 | length 3.7
  Top Layer w0.3: X1.1 2.8,3.2 4.125,3.2 R8.2@5,2.325
NetR10_1: R10.1 S1.3 | length 16
  Bottom Layer w0.3: S1.3 10.4,16.535 10.4,9.061 14.111,5.35 R10.1@14.2,5.35
NetVD1_1: VD1.1 X1.8 | length 6
  Top Layer w0.3: X1.8 3.4,21.78 4.495,22.875 5.625,22.875 6.725,23.975 VD1.1
OA1: C14.1 L1.2 X2.4 | length 19.2
  Top Layer w0.5: L1.2 32.65,2.925 35,2.925 35.925,2 41.207,2 41.5,2.293 41.5,9.76 X2.4
OA2: C12.1 L2.2 X2.3 | length 9.4
  Top Layer w0.5: L2.2 33.275,4.925 35.1,4.925 36.9,6.725 38.005,6.725 X2.3
OB1: C10.1 L3.2 X2.5 | length 10.4
  Top Layer w0.2: L3.2 L3.2@32.9,8
  Top Layer w0.5: L3.2@32.9,8 C10.1 35.275,8 38.675,11.4 38.675,12.575 X2.5@39.937,13.838
OB2: C8.1 L4.2 X2.6 | length 9.9
  Top Layer w0.5: L4.2 32.887,10.963 34.937,10.963 34.95,10.95 34.95,11 36.171,12.221 36.654,12.221 38.193,13.759 38.193,14.533 X2.6
PGND: C5.2 C6.2 C7.2 C8.2 C9.2 C10.2 C11.2 C12.2 C13.2 C14.2 R13.1 R14.1 VD2.2 X2.8
  other v1: 37.75,2.975 37.75,3.75 37.775,4.6 37.8,5.4 34,7 36,7 37.8,7.8 38,8.5 35,9 38,9.3 37.575,11.45 37.75,12.225 25.95,12.925 26.65,12.925 30.25,13.275 29.275,13.3 32.375,13.3 31.3,13.325 25.35,13.725 36.575,13.725 26.05,13.75 35.25,13.825 24,15 28,15 30,15 32,15 34,15 36,15 38,23 40,23 17,25 21,25 23,25 25,25 27,25 29,25 31,25 33,25 35,25 37,25 39,25 41,25 16,27 18,27 20,27 22,27 34,27 36,27 38,27 40,27
pads on no net: DD1.7 DD1.20 DD1.25

## Polygon pours and split planes (outlines as drawn)
GND on Top Layer (solid, pour order 125): 41.6,7.2 39.075,7.2 39.025,7.25 38.8,7.025 38.8,1.125 28.1,1.125 27.725,1.5 27.725,11.55 15.975,11.55 13.9,13.625 13.9,29.975 -0.075,29.975 -0.15,29.9 0.075,29.675 0.075,-0.075 41.775,-0.075
PGND on Top Layer (solid, pour order 123): 41.9,29.85 41.725,29.675 14.475,29.675 14.475,13.225 15.675,12.025 28.3,12.025 28.3,2.05 28.7,1.65 38.45,1.65 38.45,7.375 38.675,7.6 41.775,7.6
PGND on Top Layer (solid, pour order 107): 38.225,6 36.75,6 35.875,5.125 35.875,2.275 35.95,2.2 37.55,2.2 38.4,3.05 38.4,5.475
NetDD1_21 on Top Layer (solid, pour order 75): 31.5,6.8 29.2,6.8 29.2,4.75 29.35,4.6 31.5,4.6
GND on Top Layer (solid, pour order 113): 24.625,4.275 26.825,4.275 27.325,3.775 25.7,2.15 24.625,2.15
GND on Top Layer (solid, pour order 111): 20.625,7.5 24.4,7.5 24.75,7.15 24.75,6.175 21.875,6.175 20.225,4.525 19.15,4.525 19.15,4.85 19.15,4.975 19.15,5.775 20.075,5.775 20.45,6.15 20.45,6.875
GND on Top Layer (solid, pour order 109): 15.275,7.85 14.2,7.85 13.5,7.15 13.5,5.925 15.175,5.925
PGND on Top Layer (solid, pour order 105): 35.9,11.425 35.9,10.325 35.95,10.275 35.975,10.3 36.975,10.3 38.15,11.475 38.15,13.1 38.025,13.1 36.575,11.65
+5В on Top Layer (solid, pour order 99): 21.925,8.65 21.6,8.975 21.6,9.525 22.225,10.15 23.275,10.15 23.975,9.45 23.975,7.575 22.05,7.575 21.9,7.725
PGND on Top Layer (solid, pour order 81): 41.4,20.3 41.3,20.4 38.4,20.4 37.65,21.15 37.6,21.1 34.2,21.1 34.2,23.6 22.6,23.6 22.2,23.6 22.2,23.2 20.5,23.2 20.5,23.8 14.5,23.8 14.5,30 41.9,30 41.9,20.4
NetDD1_23 on Top Layer (solid, pour order 87): 17.1,23.675 17.1,21.6 20.175,21.6 20.175,23.575
NetDD1_27 on Top Layer (solid, pour order 85): 13.975,23.65 14,23.675 16.925,23.675 16.925,21.5 16.85,21.575 14,21.575
NetDD1_1 on Top Layer (solid, pour order 39): 15.2,14.1 15.6,13.7 16.2,12.8 16.2,12.4 14.5,12.4 13.7,13.2 13.7,13.7 14.1,14.1
PGND on Top Layer (solid, pour order 83): 19.5,24
PGND on Top Layer (solid, pour order 79): 36.5,7.1 37.8,7.1 38.5,7.8 38.5,9.8 37.7,9.8 36.5,8.6
NetDD1_24 on Top Layer (solid, pour order 77): 31.6,4.375 29.475,4.375 29.2,4.1 29.2,2.25 29.525,1.925 31.6,1.925
NetDD1_26 on Top Layer (solid, pour order 73): 31.525,9.5 29.3,9.5 29.3,7.2 29.45,7.05 31.525,7.05
NetDD1_1 on Top Layer (solid, pour order 69): 32,12.275 29.875,12.275 29.4,11.8 29.4,10.35 29.925,9.825 32,9.825
no net on Top Layer (solid, pour order 67): 32,11
no net on Top Layer (solid, pour order 65): 31.95,11
+24В on Top Layer (solid, pour order 63): 19.3,12.875 19.7,12.875 19.9,13.075 20.088,13.387 21.55,15.297 21.55,21.325 15.275,21.325 14.65,21.325 14.65,14.55 15.325,14.55 15.825,13.575 16.125,13.025 16.25,12.9 16.725,12.9 16.725,13.925 15.35,15.3 15.475,15.3 16.75,16.575 16.775,16.55 19.575,16.55 20.775,15.35 19.45,14.025 19.275,14.025
NetDD1_27 on Top Layer (solid, pour order 49): 17.15,12.9 16.8,12.9 16.8,14 15.55,15.25 16.4,16.1 17.15,16.1
NetDD1_23 on Top Layer (solid, pour order 59): 18.85,12.9 19.2,12.9 19.2,14 20.45,15.25 19.6,16.1 18.85,16.1
NetDD1_24 on Top Layer (solid, pour order 57): 18.65,13 18.65,16.3 18.1,16.3 18.1,14 18.3,13.8 18.3,13
NetDD1_26 on Top Layer (solid, pour order 55): 17.35,13 17.35,16.3 17.9,16.3 17.9,14 17.7,13.8 17.7,13
NetDD1_21 on Top Layer (solid, pour order 43): 20.8,14.1 20.5,13.7 19.8,12.8 19.8,12.4 21.5,12.4 22.3,13.2 22.3,13.7 21.9,14.1
no net on Top Layer (solid, pour order 31): 19.3,12.95
no net on Top Layer (solid, pour order 25): 18.35,12.9
no net on Top Layer (solid, pour order 19): 17.675,12.9
no net on Top Layer (solid, pour order 17): 17.675,12.9
no net on Top Layer (solid, pour order 13): 16.5,12.9
no net on Top Layer (solid, pour order 9): 16.2,12.4
+24В on Top Layer (solid, pour order 7): 41,20.1 37.7,20.1 37,20.8 33.9,20.8 33.9,23.3 21.94,23.3 20.7,22.206 20.7,16.7 33.3,16.7 34.3,15.7 34.4,15.8 38.3,15.8 38.3,17.2 38.8,17.7 41.1,17.7 41.1,20
GND on Top Layer "Top Layer-GND 9" (solid, pour order 2): 10.25,2.025
no net on Board (solid): 16.6,16.6
GND on Signal Layer 2 (solid, pour order 139): 41.45,7.275 38.925,7.275 38.875,7.325 38.65,7.1 38.65,1.2 27.95,1.2 27.575,1.575 27.575,11.625 15.825,11.625 13.75,13.7 13.75,30.05 -0.225,30.05 -0.3,29.975 -0.075,29.75 -0.075,0 41.625,0
PGND on Signal Layer 2 (solid, pour order 141): 41.75,29.925 41.575,29.75 14.325,29.75 14.325,13.3 15.525,12.1 28.15,12.1 28.15,2.125 28.55,1.725 38.3,1.725 38.3,7.45 38.525,7.675 41.625,7.675
NetDD1_23 on Signal Layer 2 (solid, pour order 91): 17.2,23.3 20.1,23.3 20.1,21.6 20.4,21.3 20.4,15.2 19.4,14.2 19,14.2 19,17.6 17.2,19.4
NetDD1_27 on Signal Layer 2 (solid, pour order 89): 17.1,14.4 15.6,14.4 14,16 14,23.3 16.9,23.3 16.9,19 17.1,18.8
PGND on Bottom Layer (solid, pour order 145): 41.875,29.975 41.7,29.8 14.45,29.8 14.45,13.35 15.65,12.15 28.275,12.15 28.275,2.175 28.675,1.775 38.425,1.775 38.425,7.5 38.65,7.725 41.75,7.725
GND on Bottom Layer (solid, pour order 143): 41.575,7.325 39.05,7.325 39,7.375 38.775,7.15 38.775,1.25 28.075,1.25 27.7,1.625 27.7,11.675 15.95,11.675 13.875,13.75 13.875,30.1 -0.1,30.1 -0.175,30.025 0.05,29.8 0.05,0.05 41.75,0.05
NetDD1_21 on Bottom Layer (solid, pour order 119): 29.95,6.8 29.175,6.8 29.175,5.325 29.85,4.65 30.225,4.65 30.15,4.725 30.15,6.825
NetDD1_24 on Bottom Layer (solid, pour order 121): 30.075,4.375 29.5,4.375 29.475,4.4 29.175,4.1 29.175,2.35 29.525,2 29.525,1.975 29.975,1.975 30.075,2.075
NetDD1_26 on Bottom Layer (solid, pour order 117): 30.225,9.5 30.2,9.525 29.3,9.525 29.3,7.675 29.9,7.075 30.325,7.075
NetDD1_1 on Bottom Layer (solid, pour order 115): 30.575,12.275 29.85,12.275 29.4,11.825 29.4,10.325 29.925,9.8 30.5,9.8
NetDD1_1 on Bottom Layer (solid, pour order 103): 15.225,14.125 14.125,14.125 13.7,13.7 13.7,13.075 13.85,13.075 14.525,12.4 15.625,13.5 15.675,13.5
NetDD1_21 on Bottom Layer (solid, pour order 101): 20.775,14.1 21.875,14.1 22.3,13.675 22.3,13.05 22.15,13.05 21.475,12.375 20.375,13.475 20.325,13.475
+5В on Bottom Layer (solid, pour order 97): 8.7,6.1 10.4,6.1 10.4,4.3 8.7,4.3
no net on Bottom Layer (solid, pour order 95): 7.9,5.3
+5В on Bottom Layer (solid, pour order 93): 10,1.6 12.2,1.6 12.2,0.3 10,0.3
GND on Signal Layer 1 (solid, pour order 135): 41.45,7.275 38.925,7.275 38.875,7.325 38.65,7.1 38.65,1.2 27.95,1.2 27.575,1.575 27.575,11.625 15.825,11.625 13.75,13.7 13.75,30.05 -0.225,30.05 -0.3,29.975 -0.075,29.75 -0.075,0 41.625,0
PGND on Signal Layer 1 (solid, pour order 137): 41.75,29.925 41.575,29.75 14.325,29.75 14.325,13.3 15.525,12.1 28.15,12.1 28.15,2.125 28.55,1.725 38.3,1.725 38.3,7.45 38.525,7.675 41.625,7.675

## Silkscreen, mask and mechanical layers (free items; w line width, h text height)
Top Overlay:
  text ".designation" at -3.6,28.2 h1.2
Bottom Overlay:
  text ".pcb_dec_number" at 12.475,28.3 h1.2
Board:
  the board outline again, w0.1
Assembly Notes (Mech5):
  text "'.title'" at -0.013,-1.775 h1.2
  text "'.project'_'.pcb_dec_number'['.Pcb_File_Name_No_Path']" at -0.05,-3 h1.2